# Altium PCB MolsonPCB.PcbDoc (part 5 of 9)
Units mil, origin at the board's own origin, x right, y up, seen from the top; angles counter-clockwise.
Board outline 8000 x 6000 mil, 14 copper layers (TopLayer (1 oz), InternalPlane1 (0.5 oz), InternalPlane2 (0.5 oz), MidLayer1 (0.5 oz), InternalPlane3 (0.5 oz), MidLayer2 (0.5 oz), InternalPlane4 (0.5 oz), InternalPlane5 (0.5 oz), MidLayer3 (0.5 oz), InternalPlane6 (0.5 oz), MidLayer4 (0.5 oz), InternalPlane7 (0.5 oz), InternalPlane8 (0.5 oz), BottomLayer (1 oz)), stack 86.2 mil thick; 657 components, 643 nets, 3094 pads, 1958 vias.
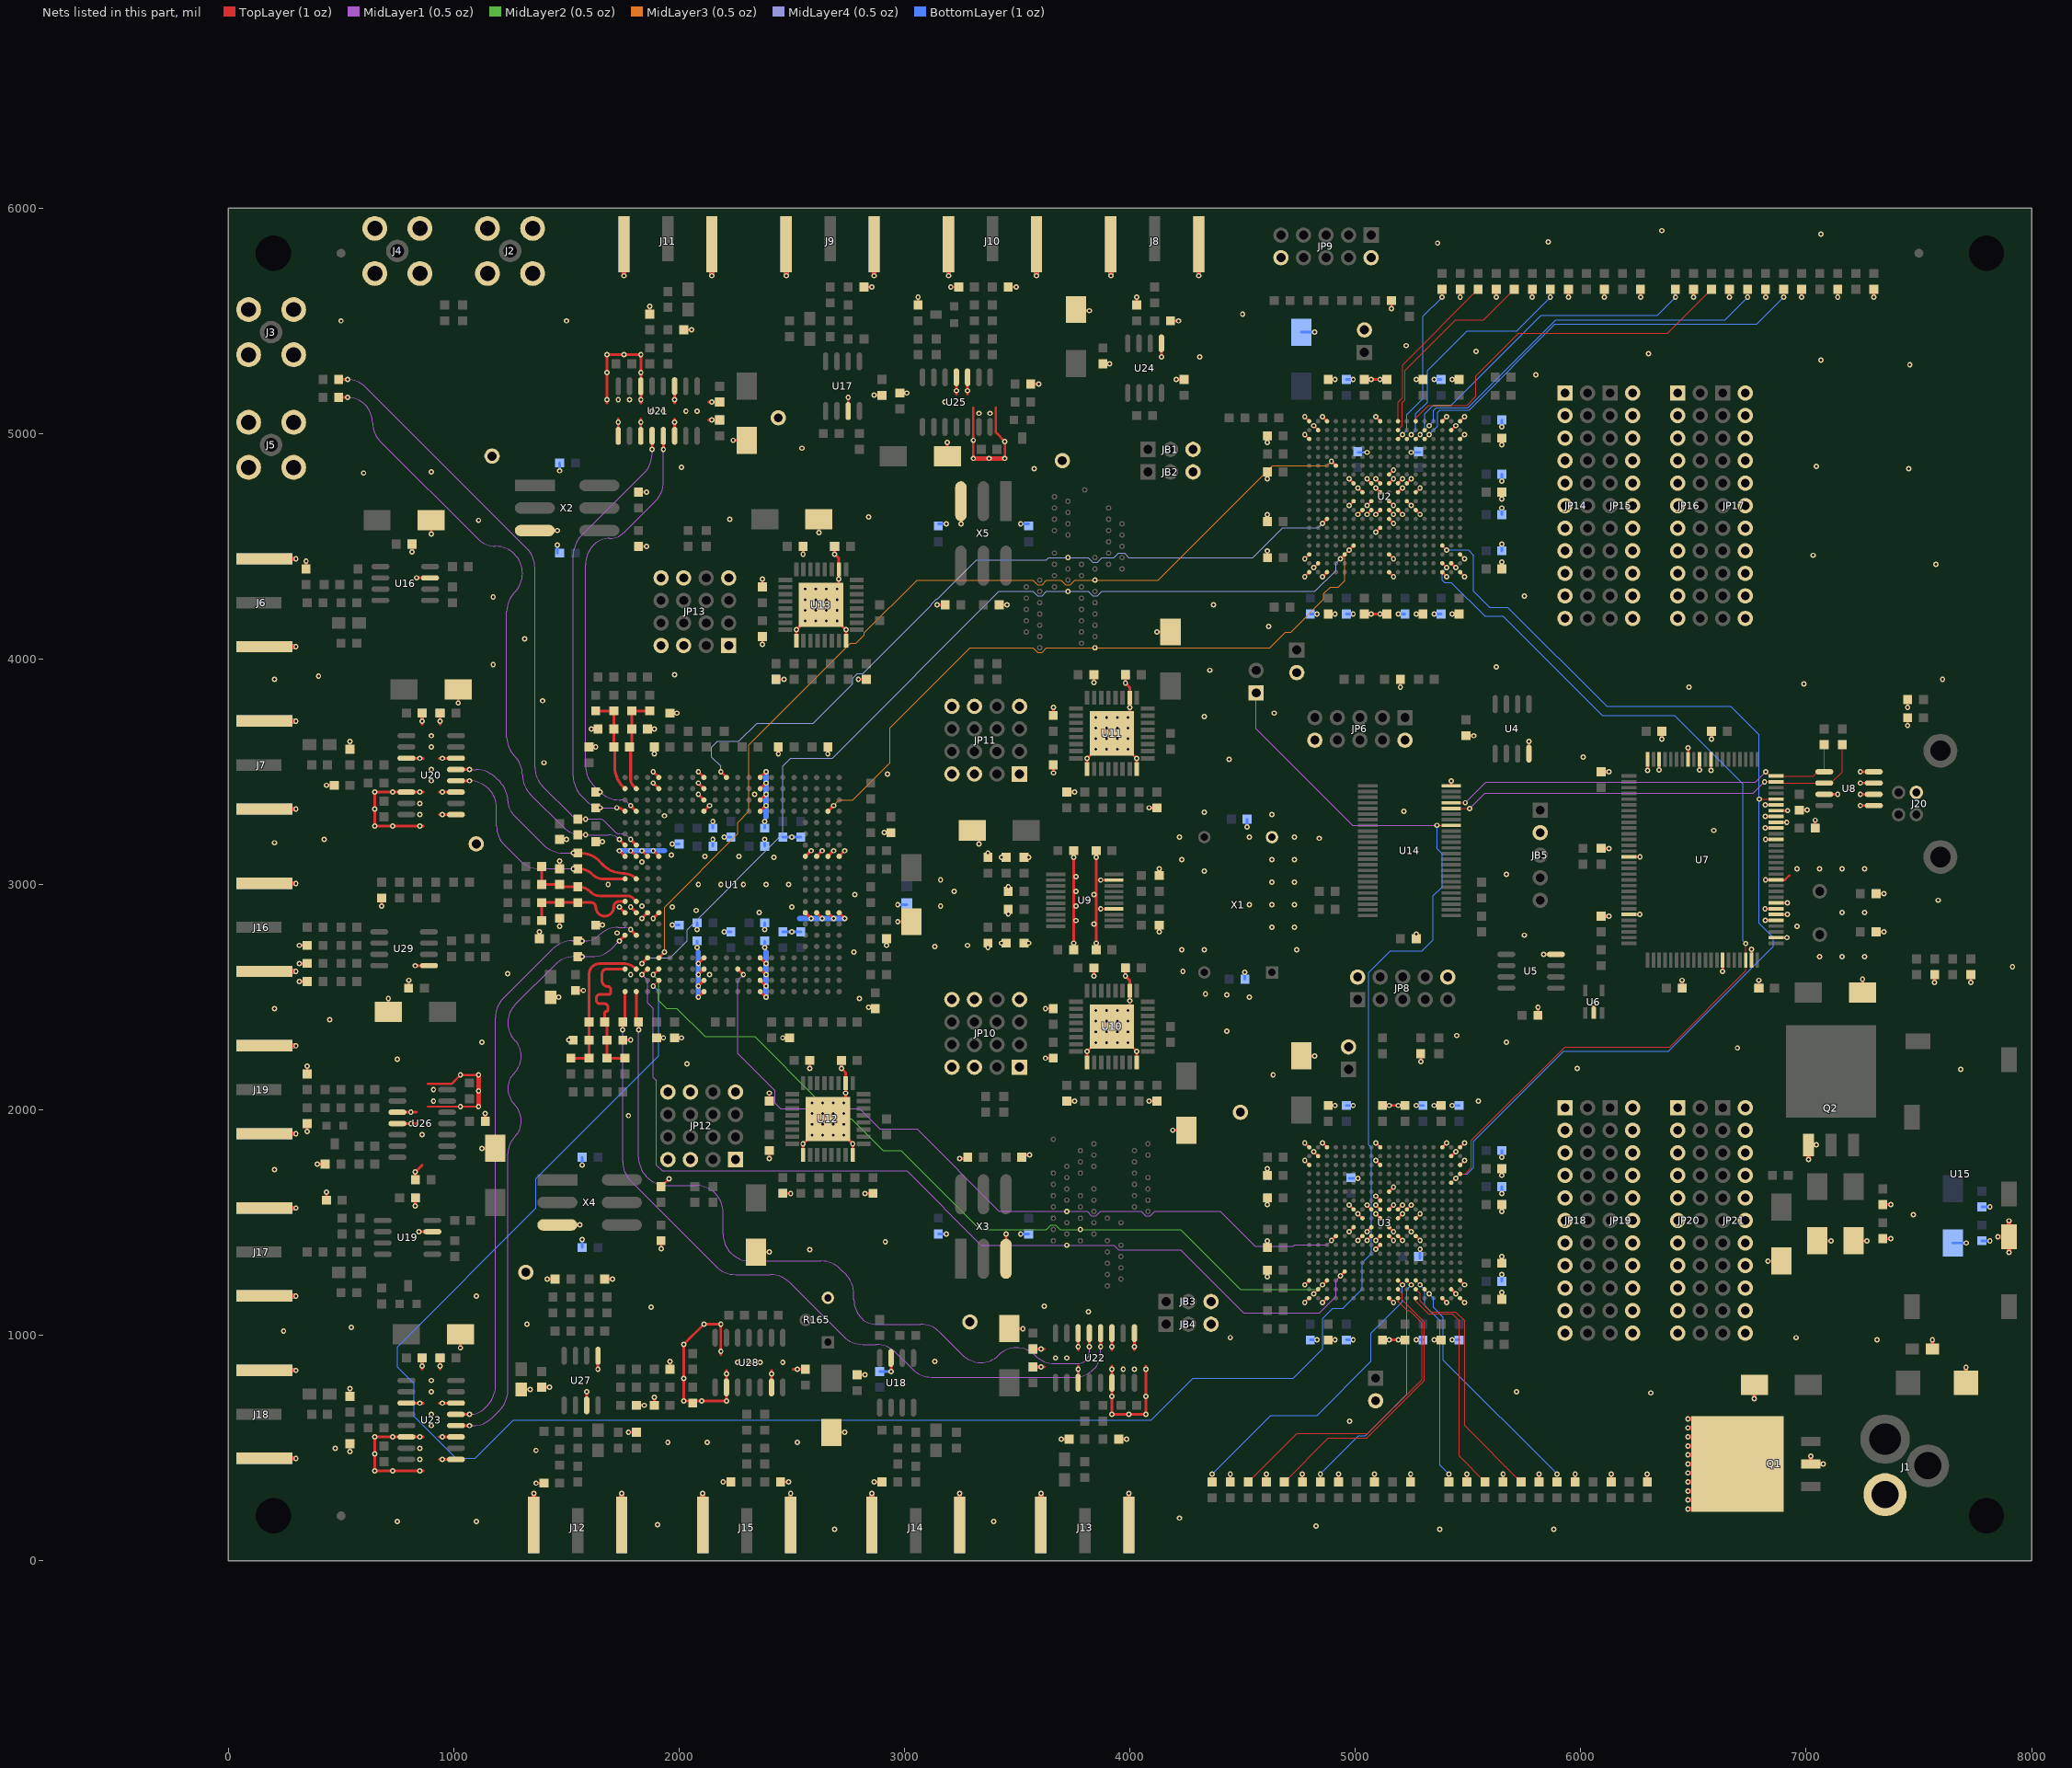
[diagram p17: the nets of this part, all layers, seen from the top]

## Via types
v1: diameter 24, hole 12, TopLayer (1 oz) to BottomLayer (1 oz), 1958 vias

## Nets (pads, with @x,y where several pads share a name; then routed paths per layer and width w, separated by ;. In a path a pad name is that pad's centre, name@x,y a point inside that pad or via, vN(x,y) a via of type N, cw(c..) or ccw(c..) an arc to the next point about the centre after c; other vN are vias at no path point) (continued)
FD15: U2.T2 U3.A4 U7.98 | length 4344.1
  TopLayer (1 oz) w5: U2.T2@5385.9,4424.73 v1(5405.59,4405.04) ; U3.A4@5464.65,1716.53 5486.53,1716.53 5515,1745 5515,1865 5930,2280 6395,2280 6731.93,2616.93 v1(6731.93,2738.07)
  BottomLayer (1 oz) w5: v1(5405.59,4405.04) 5385.91,4385.35 5385.91,4349.09 5395,4340 5425,4340 5575,4190 5655,4190 6095,3750 6415,3750 6720,3445 6720,2750 v1(6731.93,2738.07)
GND: C1.2 C2.2 C3.2 C4.2 C5.2 C6.2 C7.2 C8.2 C9.2 C10.2 C11.2 C12.2 C13.2 C14.2 C15.2 C16.2 C17.2 C18.2 C19.2 C20.2 C21.2 C22.2 C23.2 C24.2 C25.2 C26.2 C27.2 C28.2 C29.2 C30.2 C31.2 C32.2 C33.2 C34.2 C35.2 C36.2 C37.2 C38.2 C39.2 C40.2 C41.1 C42.1 C45.2 C46.2 C47.2 C50.2 C51.2 C52.2 C55.2 C56.2 C57.2 C60.2 C61.2 C62.2 C63.2 C64.2 C65.2 C66.2 C73.2 C76.2 C81.2 C85.2 C87.1 C88.2 C89.2 C93.2 C94.2 C95.2 C100.1 C101.2 C107.1 C113.2 C120.2 C122.2 C125.1 C126.2 C127.2 C128.2 C129.2 C130.2 C131.2 C132.2 C133.2 C138.2 C139.2 C140.2 C141.2 C142.2 C143.2 C144.2 C145.2 C146.2 C147.2 C148.2 C149.2 C150.2 C151.2 C152.2 C153.2 C154.2 C155.2 C156.2 C157.2 C158.1 C159.2 C160.2 C161.2 C162.2 C163.2 C164.2 C165.2 C166.2 C167.2 C168.2 C169.2 C170.2 C171.2 C172.2 C173.2 C174.2 C175.2 C176.2 C177.2 C178.2 C179.2 C180.2 C181.2 C182.2 C183.2 C184.2 C185.2 C186.2 C187.2 C188.2 C189.2 C190.2 C191.2 C192.2 C193.2 C194.2 C195.2 C196.2 C197.2 C198.2 C199.2 C200.2 C201.2 C202.2 C203.2 C204.2 C205.2 C206.2 C207.2 C208.2 C209.2 C210.2 C211.2 C212.2 C213.2 C214.2 C215.2 C216.2 C217.2 C218.2 C219.2 C220.2 C221.2 C222.2 C223.2 C224.2 C225.2 C226.2 C227.2 C228.2 C229.2 C230.2 C231.2 C232.2 C233.2 C234.2 C235.2 C236.2 C237.2 C238.2 C239.2 C240.2 C241.2 C242.2 C243.2 C244.2 C245.2 C246.2 C247.2 C248.2 C249.2 C250.2 C251.2 C252.2 C253.2 C254.2 C255.2 C256.2 C257.2 C258.2 C259.2 C260.2 C261.2 C262.2 C263.2 C264.2 C265.2 C266.2 C267.2 C268.2 C269.2 C270.2 C271.2 C272.2 C273.2 C274.2 C275.2 C276.2 C277.2 C278.2 C279.2 C280.2 C281.2 C282.2 C283.2 C284.2 C285.2 D3.2 D4.2 D5.2 D6.2 D7.2 D8.2 D9.2 D10.2 D11.2 D12.2 D13.2 D14.2 D15.2 D16.2 D17.2 D18.2 D19.2 D20.2 D21.2 D22.2 D23.2 D24.2 D25.2 D26.2 D27.2 D28.2 J1.2 J2.2 J3.2 J4.2 J5.2 J6.2 J7.2 J8.2 J9.2 J10.2 J11.2 J12.2 J13.2 J14.2 J15.2 J16.2 J17.2 J18.2 J19.2 J20.4 JB1.3 JB2.3 JB3.3 JB4.3 JB5.2 JP1.2 JP2.2 JP3.2 JP4.2 JP6.2 JP6.10 JP8.2 JP8.10 JP9.2 JP9.10 JP10.1 JP10.3 JP10.4 JP10.13 JP10.15 JP10.16 JP11.1 JP11.3 JP11.4 JP11.13 JP11.15 JP11.16 JP12.1 JP12.3 JP12.4 JP12.13 JP12.15 JP12.16 JP13.1 JP13.3 JP13.4 JP13.13 JP13.15 JP13.16 JP14.1 JP14.3 JP14.5 JP14.7 JP14.9 JP14.11 JP14.13 JP14.15 JP14.17 JP14.19 JP14.21 JP15.2 JP15.4 JP15.6 JP15.8 JP15.10 JP15.12 JP15.14 JP15.16 JP15.18 JP15.20 JP15.22 JP16.1 JP16.3 JP16.5 JP16.7 JP16.9 JP16.11 JP16.13 JP16.15 JP16.17 JP16.19 JP16.21 JP17.2 JP17.4 JP17.6 JP17.8 JP17.10 JP17.12 JP17.14 JP17.16 JP17.18 JP17.20 JP17.22 JP18.1 JP18.3 JP18.5 JP18.7 JP18.9 JP18.11 JP18.13 JP18.15 JP18.17 JP18.19 JP18.21 JP19.2 JP19.4 JP19.6 JP19.8 JP19.10 JP19.12 JP19.14 JP19.16 JP19.18 JP19.20 JP19.22 JP20.1 JP20.3 JP20.5 JP20.7 JP20.9 JP20.11 JP20.13 JP20.15 JP20.17 JP20.19 JP20.21 JP21.2 JP21.4 JP21.6 JP21.8 JP21.10 JP21.12 JP21.14 JP21.16 JP21.18 JP21.20 JP21.22 Q1.2 Q1.4 Q2.1 R6.2 R12.2 R15.1 R39.1 R40.1 R41.1 R42.1 R43.1 R44.1 R45.1 R46.1 R47.1 R48.1 R49.1 R50.1 R51.1 R52.1 R53.1 R54.1 R55.1 R56.1 R60.1 R83.1 R84.2 R91.1 R92.1 R101.1 R103.1 R111.1 R112.1 R122.1 R123.1 R124.1 R130.1 R131.2 R132.1 R133.1 R134.1 R135.2 R136.1 R137.1 R142.1 R143.2 R144.1 R145.2 R146.1 R156.1 R157.1 R158.1 R159.1 R164.2 R165.3 R166.1 R167.1 R195.1 R220.2 R221.2 R224.2 R225.2 R228.2 R229.2 R232.2 R233.2 TP1.1 TP2.1 TP3.1 TP4.1 TP5.1 TP6.1 TP7.1 U1.A8 U1.A13 U1.B8 U1.B13 U1.C8 U1.C13 U1.D8 U1.D13 U1.D19 U1.D20 U1.H1 U1.H2 U1.H3 U1.H4 U1.H17 U1.H18 U1.H19 U1.H20 U1.N1 U1.N2 U1.N3 U1.N4 U1.N17 U1.N18 U1.N19 U1.N20 U1.U8 U1.U13 U1.V8 U1.V13 U1.W8 U1.W13 U1.Y8 U1.Y13 U2.A1 U2.A3 U2.A16 U2.A18 U2.B2 U2.B17 U2.C1 U2.C18 U2.F9 U2.F11 U2.G8 U2.G10 U2.H8 U2.H9 U2.H11 U2.J6 U2.J8 U2.J10 U2.J11 U2.J18 U2.K1 U2.K3 U2.K7 U2.K8 U2.K9 U2.K11 U2.K12 U2.L8 U2.L10 U2.L11 U2.M9 U2.M11 U2.N8 U2.N10 U2.T1 U2.T18 U2.U2 U2.U17 U2.V1 U2.V3 U2.V16 U2.V18 U3.A1 U3.A3 U3.A16 U3.A18 U3.B2 U3.B17 U3.C1 U3.C18 U3.F9 U3.F11 U3.G8 U3.G10 U3.H8 U3.H9 U3.H11 U3.J6 U3.J8 U3.J10 U3.J11 U3.J18 U3.K1 U3.K3 U3.K7 U3.K8 U3.K9 U3.K11 U3.K12 U3.L8 U3.L10 U3.L11 U3.M9 U3.M11 U3.N8 U3.N10 U3.T1 U3.T18 U3.U2 U3.U17 U3.V1 U3.V3 U3.V16 U3.V18 U4.4 U5.4 U6.2 U7.2 U7.5 U7.6 U7.7 U7.8 U7.12 U7.19 U7.21 U7.22 U7.23 U7.24 U7.25 U7.39 U7.41 U7.43 U7.48 U7.50 U7.65 U7.75 U7.94 U7.99 U8.1 U8.2 U8.3 U8.4 U8.7 U9.4 U9.9 U10.10 U10.25 U10.32 U10.33 U11.10 U11.25 U11.32 U11.33 U12.10 U12.25 U12.32 U12.33 U13.10 U13.25 U13.32 U13.33 U14.24 U15.P3 U16.3 U17.3 U18.3 U19.3 U20.3 U20.6 U20.9 U20.11 U20.14 U21.3 U21.6 U21.9 U21.11 U21.14 U22.3 U22.6 U22.9 U22.11 U22.14 U23.3 U23.6 U23.9 U23.11 U23.14 U24.5 U25.10 U25.11 U26.10 U26.11 U27.3 U27.5 U28.2 U28.6 U29.5 X1.7 X2.3 X3.3 X4.3 X5.3 | length 34903.7
  TopLayer (1 oz) w10: 885,2015 v1(1030,2015) v1(1110,2015) ; 885,2115 990,2115 v1(1030,2155) v1(1110,2155) ; U21.11@1830,4990 1830,5065 ; 2185,915 v1(2185,1050) ; v1(2370,4065) R55.1@2370,4100 ; R56.1@2370,4320 v1(2370,4355) ; v1(2400,1785) R53.1@2400,1820 ; R54.1@2400,2040 v1(2400,2075) ; v1(3305,4890) v1(3305,4970) 3305,5115 ; 3405,5115 3405,5005 v1(3445,4965) v1(3445,4890) ; v1(3625,2230) R49.1@3660,2230 ; v1(3625,2450) R50.1@3660,2450 ; v1(3870,2891.61) U9.4@3928.94,2891.61 ; v1(3870,3019.57) U9.9@3928.94,3019.57 ; v1(4775.67,1145.67) U3.V18@4795.35,1165.35 ; v1(4775.67,1224.41) U3.V16@4795.35,1244.1 ; v1(4775.67,1775.59) U3.V3@4795.35,1755.9 ; v1(4775.67,1854.33) U3.V1@4795.35,1834.65 ; v1(4775.67,4365.67) U2.A1@4795.35,4385.35 ; v1(4775.67,4444.41) U2.A3@4795.35,4464.1 ; v1(4775.67,4995.59) U2.A16@4795.35,4975.9 ; v1(4775.67,5074.33) U2.A18@4795.35,5054.65 ; v1(4815.04,1185.04) U3.U17@4834.73,1204.73 ; v1(4815.04,1814.96) U3.U2@4834.73,1795.27 ; v1(4815.04,4405.04) U2.B2@4834.73,4424.73 ; v1(4815.04,5034.96) U2.B17@4834.73,5015.27 ; v1(4854.41,1145.67) U3.T18@4874.1,1165.35 ; v1(4854.41,1854.33) U3.T1@4874.1,1834.65 ; v1(4854.41,4365.67) U2.C1@4874.1,4385.35 ; v1(4854.41,5074.33) U2.C18@4874.1,5054.65 ; v1(4972.52,1460.63) U3.N10@4992.2,1480.31 ; v1(4972.52,1578.74) U3.N8@4992.2,1559.06 ; v1(4972.52,4680.63) U2.F9@4992.2,4700.31 ; v1(4972.52,4798.74) U2.F11@4992.2,4779.06 ; v1(5011.89,1421.26) U3.M11@5031.57,1440.94 ; v1(5011.89,1539.37) U3.M9@5031.57,1519.69 ; v1(5011.89,4641.26) U2.G8@5031.57,4660.94 ; v1(5011.89,4759.37) U2.G10@5031.57,4739.69 ; v1(5051.26,1421.26) U3.L11@5070.94,1440.94 ; v1(5051.26,1460.63) U3.L10@5070.94,1480.31 ; v1(5051.26,1578.74) U3.L8@5070.94,1559.06 ; v1(5051.26,4641.26) U2.H8@5070.94,4660.94 ; v1(5051.26,4680.63) U2.H9@5070.94,4700.31 ; v1(5051.26,4798.74) U2.H11@5070.94,4779.06 ; v1(5090.63,1381.89) U3.K12@5110.31,1401.57 ; v1(5090.63,1421.26) U3.K11@5110.31,1440.94 ; v1(5090.63,1539.37) U3.K9@5110.31,1519.69 ; v1(5090.63,1578.74) U3.K8@5110.31,1559.06 ; v1(5090.63,1618.11) U3.K7@5110.31,1598.43 ; v1(5090.63,1775.59) U3.K3@5110.31,1755.9 ; v1(5090.63,1854.33) U3.K1@5110.31,1834.65 ; v1(5090.63,4562.52) U2.J6@5110.31,4582.2 ; v1(5090.63,4641.26) U2.J8@5110.31,4660.94 ; v1(5090.63,4759.37) U2.J10@5110.31,4739.69 ; v1(5090.63,4798.74) U2.J11@5110.31,4779.06 ; v1(5090.63,5074.33) U2.J18@5110.31,5054.65 ; U3.J18@5149.69,1165.35 v1(5169.37,1145.67) ; U3.J11@5149.69,1440.94 v1(5169.37,1421.26) ; U3.J10@5149.69,1480.31 v1(5169.37,1460.63) ; U3.J8@5149.69,1559.06 v1(5169.37,1578.74) ; U3.J6@5149.69,1637.8 v1(5169.37,1657.48) ; U2.K1@5149.69,4385.35 v1(5169.37,4365.67) ; U2.K3@5149.69,4464.1 v1(5169.37,4444.41) ; U2.K7@5149.69,4621.57 v1(5169.37,4601.89) ; U2.K8@5149.69,4660.94 v1(5169.37,4641.26) ; U2.K9@5149.69,4700.31 v1(5169.37,4680.63) ; U2.K11@5149.69,4779.06 v1(5169.37,4798.74) ; U2.K12@5149.69,4818.43 v1(5169.37,4838.11) ; U3.H11@5189.06,1440.94 v1(5208.74,1421.26) ; U3.H9@5189.06,1519.69 v1(5208.74,1539.37) ; U3.H8@5189.06,1559.06 v1(5208.74,1578.74) ; U2.L8@5189.06,4660.94 v1(5208.74,4641.26) ; U2.L10@5189.06,4739.69 v1(5208.74,4759.37) ; U2.L11@5189.06,4779.06 v1(5208.74,4798.74) ; U3.G10@5228.43,1480.31 v1(5248.11,1460.63) ; U3.G8@5228.43,1559.06 v1(5248.11,1578.74) ; U2.M9@5228.43,4700.31 v1(5248.11,4680.63) ; U2.M11@5228.43,4779.06 v1(5248.11,4798.74) ; U3.F11@5267.8,1440.94 v1(5287.48,1421.26) ; U3.F9@5267.8,1519.69 v1(5287.48,1539.37) ; U2.N8@5267.8,4660.94 v1(5287.48,4641.26) ; U2.N10@5267.8,4739.69 v1(5287.48,4759.37) ; U3.C18@5385.9,1165.35 v1(5405.59,1145.67) ; U3.C1@5385.9,1834.65 v1(5405.59,1854.33) ; U2.T1@5385.9,4385.35 v1(5405.59,4365.67) ; U2.T18@5385.9,5054.65 v1(5405.59,5074.33) ; U14.24@5425.04,3437.5 v1(5425.04,3459.96) ; U3.B17@5425.27,1204.73 v1(5444.96,1185.04) ; U3.B2@5425.27,1795.27 v1(5444.96,1814.96) ; U2.U2@5425.27,4424.73 v1(5444.96,4405.04) ; U2.U17@5425.27,5015.27 v1(5444.96,5034.96) ; U3.A18@5464.65,1165.35 v1(5484.33,1145.67) ; U3.A16@5464.65,1244.1 v1(5484.33,1224.41) ; U3.A3@5464.65,1755.9 v1(5484.33,1775.59) ; U3.A1@5464.65,1834.65 v1(5484.33,1854.33) ; U2.V1@5464.65,4385.35 v1(5484.33,4365.67) ; U2.V3@5464.65,4464.1 v1(5484.33,4444.41) ; U2.V16@5464.65,4975.9 v1(5484.33,4995.59) ; U2.V18@5464.65,5054.65 v1(5484.33,5074.33) ; U7.75@6213.03,2866.89 v1(6261.89,2866.89) ; U7.65@6213.03,3122.8 v1(6262.8,3122.8) ; v1(6296.89,3506.89) U7.50@6296.89,3555.08 ; v1(6348.07,3508.07) U7.48@6348.07,3555.08 ; U7.43@6476.02,3555.08 v1(6476.02,3606.02) ; v1(6527.2,3507.8) U7.41@6527.2,3555.08 ; v1(6578.39,3506.61) U7.39@6578.39,3555.08 ; v1(6629.57,2615.43) U7.94@6629.57,2664.92 ; U7.99@6757.52,2664.92 v1(6757.52,2712.52) ; v1(6817.52,2892.48) U7.7@6866.97,2892.48 ; v1(6818.07,3301.93) U7.23@6866.97,3301.93 ; v1(6818.11,3353.11) U7.25@6866.97,3353.11 ; v1(6818.7,2841.3) U7.5@6866.97,2841.3 ; v1(6819.25,3250.75) U7.21@6866.97,3250.75 ; v1(6819.57,3020.43) 6905.43,3020.43 6925,3040 ; v1(6819.57,3199.57) U7.19@6866.97,3199.57 ; U7.2@6866.97,2764.53 v1(6914.53,2764.53) ; U7.6@6866.97,2866.89 v1(6916.89,2866.89) ; U7.8@6866.97,2918.07 v1(6916.93,2918.07) ; U7.22@6866.97,3276.34 v1(6913.66,3276.34) ; U7.24@6866.97,3327.52 v1(6917.48,3327.52)
  TopLayer (1 oz) w12: v1(315,2570) R124.1@350,2570 ; v1(315,2650) R123.1@350,2650 ; v1(315,2730) R122.1@350,2730 ; C199.2@345,4400 v1(345,4435) ; v1(350,1905) R137.1@350,1940 ; R112.1@350,2160 v1(350,2195) ; v1(395,1760) C113.2@430,1760 ; C202.2@435,1600 v1(435,1635) ; v1(435,3440) R130.1@470,3440 ; v1(540,485) R136.1@540,520 ; R111.1@540,730 v1(540,765) ; R83.1@540,3600 v1(540,3635) ; v1(680,2905) R166.1@680,2940 ; C139.2@710,2435 v1(710,2495) ; U26.11@750.32,1939.86 835,1940 ; U26.10@750.32,1989.86 835,1990 ; U23.3@790,700 865,700 ; U20.3@790,3560 865,3560 ; C125.1@800,2540 v1(800,2575) ; v1(815,4475) C73.2@815,4510 ; v1(830,1575) C120.2@830,1610 ; C107.1@830,1690 v1(830,1725) 860,1755 ; v1(830,2640) U29.5@890,2640 ; v1(835,4360) U16.3@895,4360 ; v1(845,1460) U19.3@905,1460 ; 860,850 C132.2@860,900 ; 860,3710 C127.2@860,3760 ; 865,400 v1(730,400) v1(650,400) v1(650,475) v1(650,550) v1(730,550) U23.6@790,550 865,550 ; 865,3260 v1(730,3260) v1(650,3260) v1(650,3335) v1(650,3410) v1(730,3410) U20.6@790,3410 865,3410 ; v1(900,4555) C203.2@900,4615 ; 935,450 U23.9@1010,450 ; 935,550 U23.11@1010,550 ; 935,700 U23.14@1010,700 ; 935,3310 U20.9@1010,3310 ; 935,3410 U20.11@1010,3410 ; 935,3560 U20.14@1010,3560 ; 940,850 C133.2@940,900 ; 940,3710 C126.2@940,3760 ; v1(1020,3805) C207.2@1020,3865 ; v1(1030,945) C210.2@1030,1005 ; v1(1125,1830) C206.2@1185,1830 ; C122.2@1140,1950 v1(1140,1985) ; C95.2@1300,760 v1(1340,760) ; X2.3@1360,4570 v1(1460,4570) ; v1(1365,345) C93.2@1400,345 ; C215.2@1380,2760 v1(1380,2790) ; C94.2@1390,770 v1(1425,770) ; v1(1415,1250) R157.1@1450,1250 ; C227.2@1430,2500 v1(1465,2500) ; X4.3@1460,1490 v1(1560,1490) ; v1(1470,2815) R144.1@1470,2850 ; R145.2@1470,3070 v1(1470,3105) ; C214.2@1470,3200 v1(1500,3200) ; C216.2@1540,2530 v1(1575,2530) ; U27.3@1590,690 v1(1590,750) ; C211.2@1600,3610 v1(1630,3610) ; v1(1610,3690) R143.2@1640,3690 ; C7.2@1630,2820 v1(1660,2820) ; C8.2@1630,3190 v1(1660,3190) ; v1(1640,850) U27.5@1640,910 ; R156.1@1670,1250 v1(1705,1250) ; 1680,5135 v1(1680,5270) v1(1680,5350) v1(1755,5350) v1(1830,5350) v1(1830,5270) U21.6@1830,5210 1830,5135 ; U21.9@1730,4990 1730,5065 ; v1(1735,2900) U1.A8@1760,2875 ; v1(1735,3150) U1.A13@1760,3125 ; R159.1@1750,2310 v1(1785,2310) ; v1(1775,570) C89.2@1810,570 ; v1(1785,2900) U1.B8@1810,2875 ; v1(1785,3150) U1.B13@1810,3125 ; R164.2@1810,690 v1(1845,690) ; R221.2@1820,4500 v1(1855,4500) ; R220.2@1820,4740 v1(1855,4740) ; v1(1835,2850) U1.C8@1860,2875 ; v1(1835,3150) U1.C13@1860,3125 ; R142.1@1860,3690 v1(1890,3690) ; R133.1@1870,5530 v1(1870,5565) ; v1(1885,2850) U1.D8@1910,2875 ; v1(1885,3150) U1.D13@1910,3125 ; v1(1885,3450) U1.D19@1910,3425 ; v1(1885,3500) U1.D20@1910,3475 ; C88.2@1890,690 v1(1890,725) ; v1(1890,3580) C1.2@1890,3610 ; C217.2@1900,2320 v1(1930,2320) ; v1(1920,1385) R229.2@1920,1420 ; R228.2@1920,1660 v1(1955,1695) ; R60.1@1960,850 v1(1960,885) ; C212.2@1960,3760 v1(1990,3760) ; C5.2@1980,2320 v1(2010,2320) ; U21.14@1980,4990 1980,5065 ; 1980,5135 U21.3@1980,5210 ; R92.1@2020,5460 v1(2055,5460) ; v1(2085,2500) U1.H1@2110,2525 ; v1(2085,2550) U1.H2@2110,2575 ; v1(2085,2600) U1.H3@2110,2625 ; v1(2085,2650) U1.H4@2110,2675 ; v1(2085,3400) U1.H18@2110,3375 ; v1(2085,3450) U1.H19@2110,3425 ; v1(2085,3500) U1.H20@2110,3475 ; U1.H17@2110,3325 v1(2135,3350) ; 2130,5060 C128.2@2180,5060 ; 2130,5140 C129.2@2180,5140 ; v1(2185,1050) v1(2110,1050) v1(2020,960) v1(2020,810) v1(2020,710) 2060,710 v1(2100,710) v1(2210,710) 2210,769.68 2210,845 ; v1(2195,350) R103.1@2230,350 ; v1(2240,4970) C208.2@2300,4970 ; C243.2@2340,1370 v1(2400,1370) ; U1.N1@2360,2525 v1(2385,2500) ; U1.N2@2360,2575 v1(2385,2550) ; U1.N3@2360,2625 v1(2385,2600) ; U1.N4@2360,2675 v1(2385,2650) ; U1.N17@2360,3325 v1(2385,3350) ; U1.N18@2360,3375 v1(2385,3400) ; U1.N19@2360,3425 v1(2385,3450) ; U1.N20@2360,3475 v1(2385,3500) ; U28.6@2409.86,769.68 2410,845 ; C61.2@2430,3910 v1(2465,3910) ; v1(2440,3580) C2.2@2440,3610 ; R135.2@2450,350 v1(2485,350) ; C55.2@2460,1630 v1(2495,1630) ; v1(2460,2320) C6.2@2490,2320 ; 2505,850 C145.2@2560,850 ; U13.25@2519.76,4081.54 v1(2519.76,4129.76) U13.33@2540,4150 ; U12.25@2549.76,1801.54 v1(2549.76,1849.76) U12.33@2570,1870 ; v1(2550,4465) C239.2@2550,4500 ; U1.U8@2560,2875 v1(2585,2850) ; U1.U13@2560,3125 v1(2585,3150) ; v1(2580,2185) C236.2@2580,2220 ; U1.V8@2610,2875 v1(2635,2850) ; U1.V13@2610,3125 v1(2635,3150) ; v1(2620,4560) C244.2@2620,4620 ; U1.W8@2660,2875 v1(2685,2850) ; U1.W13@2660,3125 v1(2685,3150) ; v1(2660,3580) C213.2@2660,3610 ; C205.2@2675,570 v1(2735,570) ; C62.2@2690,4500 v1(2690,4465) 2708.74,4446.26 U13.33@2708.74,4331.26 ; U1.Y8@2710,2875 v1(2735,2850) ; U1.Y13@2710,3125 v1(2735,3150) ; C57.2@2720,2220 v1(2720,2185) 2738.74,2166.26 U12.33@2738.74,2051.26 ; U13.33@2720,4150 v1(2740.24,4129.76) U13.32@2740.24,4081.53 ; U12.33@2750,1870 v1(2770.24,1849.76) U12.32@2770.24,1801.53 ; U17.3@2750,5100 v1(2750,5160) ; C101.2@2790,825 v1(2825,825) ; v1(2795,3910) C60.2@2830,3910 ; C200.2@2820,5650 v1(2855,5650) ; v1(2825,1630) C56.2@2860,1630 ; v1(2840,2455) C218.2@2870,2455 ; v1(2865,350) C201.2@2900,350 ; v1(2865,5170) C85.2@2900,5170 ; v1(2910,3230) C3.2@2940,3230 ; v1(2920,2730) C4.2@2920,2760 ; v1(2940,840) U18.3@2940,900 ; v1(2970,2835) C167.2@3030,2835 ; C144.2@2980,5180 v1(3010,5180) ; C76.2@3060,5570 v1(3060,5605) ; v1(3145,4240) R233.2@3180,4240 ; C204.2@3190,4900 v1(3190,4960) ; v1(3205,5650) R132.1@3240,5650 ; U25.11@3229.86,5249.68 3230,5175 ; v1(3245,1785) R224.2@3280,1785 ; v1(3250,4600) X5.3@3250,4700 ; U25.10@3279.86,5249.68 3280,5175 ; v1(3330,3180) C245.2@3330,3240 ; R232.2@3420,4240 v1(3455,4240) ; X3.3@3450,1340 v1(3450,1450) ; R91.1@3460,5650 v1(3495,5650) ; C209.2@3465,1030 v1(3525,1030) ; R225.2@3520,1800 v1(3555,1800) ; C81.2@3560,5220 v1(3595,5220) ; C130.2@3570,860 3620,860 ; C131.2@3570,940 3620,940 ; v1(3660,3495) R51.1@3660,3530 ; R52.1@3660,3750 v1(3660,3785) ; v1(3695,540) R101.1@3730,540 ; C46.2@3720,2040 v1(3755,2040) ; C51.2@3720,3410 v1(3755,3410) ; C141.2@3750,2710 C140.2@3750,3150 ; C138.2@3760,5545 v1(3820,5545) ; U22.3@3770,790 3770,865 ; 3770,935 U22.14@3770,1010 ; U10.25@3809.76,2211.54 v1(3809.76,2259.76) U10.33@3830,2280 ; U11.25@3809.76,3511.54 v1(3809.76,3559.76) U11.33@3830,3580 ; v1(3840,2595) C230.2@3840,2630 ; v1(3840,3895) C233.2@3840,3930 ; C247.2@3850,2710 C246.2@3850,3150 ; C87.1@3880,5310 v1(3910,5310) ; 3920,865 U22.6@3920,790 v1(3920,730) v1(3920,650) v1(3995,650) v1(4070,650) v1(4070,730) 4070,865 ; 3920,935 U22.11@3920,1010 ; R134.1@3950,540 v1(3985,540) ; C45.2@3980,2630 v1(3980,2593.74) 3998.74,2575 U10.33@3998.74,2461.26 ; C50.2@3980,3930 v1(3980,3893.74) 3998.74,3875 U11.33@3998.74,3761.26 ; U10.33@4010,2280 v1(4030.24,2259.76) U10.32@4030.24,2211.53 ; U11.33@4010,3580 v1(4030.24,3559.76) U11.32@4030.24,3511.53 ; 4020,935 U22.9@4020,1010 ; R131.2@4030,5570 v1(4030,5605) ; v1(4085,2040) C47.2@4120,2040 ; v1(4085,3340) C52.2@4120,3340 ; v1(4120,4120) C242.2@4180,4120 ; v1(4140,5340) U24.5@4140,5400 ; R84.2@4180,5500 v1(4215,5500) ; v1(4190,1910) C241.2@4250,1910 ; v1(4205,5240) R146.1@4240,5240 ; D20.2@4445,350 v1(4445,385) ; D19.2@4605,350 v1(4605,385) ; v1(4610,1260) C33.2@4610,1290 ; C195.2@4610,1390 v1(4610,1420) ; v1(4610,1580) C34.2@4610,1610 ; C193.2@4610,1710 v1(4610,1740) ; C14.2@4610,4450 v1(4610,4480) ; C20.2@4610,4610 v1(4610,4640) ; v1(4610,4800) C180.2@4610,4830 ; v1(4610,4960) C21.2@4610,4990 ; C251.2@4760,2240 v1(4820,2240) ; D18.2@4765,350 v1(4765,385) ; C197.2@4880,980 v1(4910,980) ; C30.2@4880,2020 v1(4910,2020) ; C182.2@4880,4200 v1(4910,4200) ; C178.2@4880,5240 v1(4910,5240) ; D17.2@4925,350 v1(4925,385) ; C149.2@5040,4200 C148.2@5140,4200 ; C147.2@5040,5240 C146.2@5140,5240 ; D15.2@5085,350 v1(5085,385) ; C150.2@5120,980 C151.2@5220,980 ; C152.2@5120,2020 C153.2@5220,2020 ; v1(5160,5555) R15.1@5160,5590 ; v1(5200,3875) R6.2@5200,3910 ; D16.2@5245,350 v1(5245,385) ; v1(5270,4200) C18.2@5300,4200 ; v1(5270,5240) C16.2@5300,5240 ; v1(5290,2215) R12.2@5290,2250 ; v1(5350,980) C31.2@5380,980 ; v1(5350,2020) C192.2@5380,2020 ; v1(5430,4200) C183.2@5460,4200 ; v1(5430,5240) C179.2@5460,5240 ; v1(5465,5605) D8.2@5465,5640 ; C9.2@5490,3660 v1(5525,3660) ; D26.2@5495,350 v1(5495,385) ; v1(5625,5605) D7.2@5625,5640 ; C196.2@5650,1160 v1(5650,1190) ; C32.2@5650,1320 v1(5650,1350) ; v1(5650,1550) C194.2@5650,1580 ; v1(5650,1710) C28.2@5650,1740 ; C19.2@5650,4400 v1(5650,4430) ; v1(5650,4710) C181.2@5650,4740 ; v1(5650,4950) C15.2@5650,4980 ; D25.2@5655,350 v1(5655,385) ; U4.4@5770,3580 v1(5770,3635) ; v1(5785,5605) D6.2@5785,5640 ; C22.2@5810,2420 v1(5810,2455) ; D24.2@5815,350 v1(5815,385) ; v1(5835,2690) U5.4@5890,2690 ; v1(5945,5605) D5.2@5945,5640 ; D23.2@5975,350 v1(5975,385) ; U6.2@6057,2430 v1(6057,2467) ; C168.2@6090,2860 v1(6125,2860) ; C40.2@6090,3160 v1(6125,3160) ; C36.2@6090,3500 v1(6125,3500) ; v1(6105,5605) D3.2@6105,5640 ; D21.2@6135,350 v1(6135,385) ; v1(6265,5605) D4.2@6265,5640 ; D22.2@6295,350 v1(6295,385) ; v1(6360,3645) C169.2@6360,3680 ; C35.2@6450,2540 v1(6450,2575) ; v1(6500,5605) D14.2@6500,5640 ; v1(6580,3645) C37.2@6580,3680 ; v1(6660,5605) D13.2@6660,5640 ; C38.2@6790,2540 v1(6790,2575) ; v1(6820,5605) D12.2@6820,5640 ; v1(6830,1330) C154.2@6890,1330 ; R195.1@6970,3330 v1(7005,3330) ; v1(6980,5605) D11.2@6980,5640 ; C39.2@7040,3250 v1(7040,3285) ; C66.2@7050,1420 v1(7110,1420) ; U8.7@7080,3400 v1(7140,3400) ; v1(7140,5605) D9.2@7140,5640 ; C262.2@7210,1420 v1(7270,1420) ; v1(7240,3350) U8.1@7300,3350 ; v1(7240,3400) U8.2@7300,3400 ; v1(7240,3450) U8.3@7300,3450 ; v1(7240,3500) U8.4@7300,3500 ; C260.2@7250,2520 v1(7250,2580) ; v1(7300,5605) D10.2@7300,5640 ; C41.1@7310,2790 v1(7345,2790) ; C42.1@7310,2960 v1(7345,2960) ; C65.2@7340,1430 v1(7375,1430) ; C261.2@7340,1580 v1(7375,1580) ; v1(7450,3705) R167.1@7450,3740 ; v1(7450,3785) C158.1@7450,3820 ; v1(7570,2565) D27.2@7570,2600 ; v1(7730,2565) D28.2@7730,2600 v1(7730,2565)
  TopLayer (1 oz) w20: J18.2@160,455 v1(300,455) ; J18.2@160,845 v1(300,845) ; J17.2@160,1175 v1(300,1175) ; J17.2@160,1565 v1(300,1565) ; J19.2@160,1895 v1(300,1895) ; J19.2@160,2285 v1(300,2285) ; J16.2@160,2615 v1(300,2615) ; J16.2@160,3005 v1(300,3005) ; J7.2@160,3335 v1(300,3335) ; J7.2@160,3725 v1(300,3725) ; J6.2@160,4055 v1(300,4055) ; J6.2@160,4445 v1(300,4445) ; v1(1110,2015) v1(1110,2085) v1(1110,2155) ; J12.2@1355,160 v1(1355,300) ; J12.2@1745,160 v1(1745,300) ; v1(1755,5700) J11.2@1755,5840 ; J15.2@2105,160 v1(2105,300) ; v1(2145,5700) J11.2@2145,5840 ; v1(2475,5700) J9.2@2475,5840 ; J15.2@2495,160 v1(2495,300) ; J14.2@2855,160 v1(2855,300) ; v1(2865,5700) J9.2@2865,5840 ; v1(3195,5700) J10.2@3195,5840 ; J14.2@3245,160 v1(3245,300) ; v1(3305,4890) v1(3375,4890) v1(3445,4890) ; v1(3585,5700) J10.2@3585,5840 ; J13.2@3605,160 v1(3605,300) ; v1(3915,5700) J8.2@3915,5840 ; J13.2@3995,160 v1(3995,300) ; v1(4305,5700) J8.2@4305,5840 ; v1(6475,230) Q1.4@6500,230 ; v1(6475,270) Q1.4@6500,270 ; v1(6475,310) Q1.4@6500,310 ; v1(6475,350) Q1.4@6500,350 ; v1(6475,390) Q1.4@6500,390 ; v1(6475,430) Q1.4@6500,430 ; v1(6475,470) Q1.4@6500,470 ; v1(6475,510) Q1.4@6500,510 ; v1(6475,550) Q1.4@6500,550 ; v1(6475,590) Q1.4@6500,590 ; v1(6475,630) Q1.4@6500,630 ; v1(6770,720) C64.2@6770,780 ; v1(7010,1780) Q2.1@7010,1845 v1(7045,1845) ; v1(7020,465) Q1.2@7020,430 v1(7075,430) ; C198.2@7560,940 v1(7560,980) ; C63.2@7708.94,790 v1(7708.94,858.94) ; v1(7849.96,1438.07) U15.P3@7899.72,1438.07 ; v1(7899.72,1368.31) v1(7899.72,1508.15)
  BottomLayer (1 oz) w12: v1(815,4475) C266.2@815,4510 ; v1(830,1575) C269.2@830,1610 ; v1(860,865) C276.2@860,900 ; v1(860,3725) C271.2@860,3760 ; v1(940,865) C277.2@940,900 ; v1(940,3725) C270.2@940,3760 ; C282.2@1460,4470 v1(1460,4505) ; v1(1470,4835) C278.2@1470,4870 ; C285.2@1570,1390 v1(1570,1425) ; v1(1570,1755) C281.2@1570,1790 ; v1(1970,2820) C163.2@2000,2820 ; v1(1970,3180) C159.2@2000,3180 ; v1(2080,2720) C164.2@2080,2750 ; v1(2080,2800) C226.2@2080,2830 ; v1(2145,5060) C272.2@2180,5060 ; v1(2145,5140) C273.2@2180,5140 ; C222.2@2150,3170 v1(2150,3200) ; C160.2@2150,3250 v1(2150,3280) ; v1(2200,2790) C225.2@2230,2790 ; v1(2200,3210) C221.2@2230,3210 ; v1(2380,2720) C165.2@2380,2750 ; v1(2380,2800) C224.2@2380,2830 ; C220.2@2380,3170 v1(2380,3200) ; C161.2@2380,3250 v1(2380,3280) ; C240.2@2430,3910 v1(2465,3910) ; C237.2@2460,1630 v1(2495,1630) ; C166.2@2460,2790 C223.2@2540,2790 ; C162.2@2460,3210 C219.2@2540,3210 ; v1(2690,4465) C238.2@2690,4500 ; v1(2720,2185) C235.2@2720,2220 ; v1(2865,5170) C267.2@2900,5170 ; C268.2@2890,840 v1(2940,840) ; v1(2970,2910) C228.2@3010,2910 ; C283.2@3150,1450 v1(3185,1450) ; C280.2@3150,4600 v1(3185,4600) ; v1(3515,1450) C279.2@3550,1450 ; v1(3515,4600) C284.2@3550,4600 ; C274.2@3570,860 v1(3605,860) ; C275.2@3570,940 v1(3605,940) ; C231.2@3720,2040 v1(3755,2040) ; C234.2@3720,3410 v1(3755,3410) ; v1(3980,2593.74) C229.2@3980,2630 ; v1(3980,3893.74) C232.2@3980,3930 ; C249.2@4510,2580 v1(4510,2610) ; v1(4520,3255) C248.2@4520,3290 ; v1(4610,1260) C188.2@4610,1290 ; C27.2@4610,1390 v1(4610,1420) ; v1(4610,1580) C186.2@4610,1610 ; C29.2@4610,1710 v1(4610,1740) ; C174.2@4610,4610 v1(4610,4640) ; v1(4610,4800) C17.2@4610,4830 ; v1(4610,4960) C172.2@4610,4990 ; C250.2@4760,5450 v1(4820,5450) ; C190.2@4800,980 v1(4830,980) ; C155.2@4800,4200 v1(4830,4200) ; C157.2@4960,980 v1(4990,980) ; C184.2@4960,2020 v1(4990,2020) ; C176.2@4960,4200 v1(4990,4200) ; C170.2@4960,5240 v1(4990,5240) ; C23.2@4972.52,1696.85 v1(5011.89,1696.85) ; C10.2@5013.15,4916.85 v1(5051.26,4916.85) ; v1(5190,4200) C143.2@5220,4200 ; v1(5248.11,4916.85) C11.2@5287.48,4916.85 ; v1(5270,980) C156.2@5300,980 ; v1(5270,2020) C24.2@5300,2020 ; C26.2@5287.48,1342.52 v1(5287.48,1381.89) ; v1(5350,4200) C177.2@5380,4200 ; v1(5350,5240) C171.2@5380,5240 ; v1(5430,980) C191.2@5460,980 ; v1(5430,2020) C185.2@5460,2020 ; C189.2@5650,1240 v1(5650,1270) ; v1(5650,1630) C25.2@5650,1660 ; v1(5650,1790) C187.2@5650,1820 ; C13.2@5650,4480 v1(5650,4510) ; C175.2@5650,4640 v1(5650,4670) ; v1(5650,4790) C12.2@5650,4820 ; v1(5650,5030) C173.2@5650,5060 ; C257.2@6090,2860 v1(6125,2860) ; C256.2@6090,3160 v1(6125,3160) ; C254.2@6090,3500 v1(6125,3500) ; v1(6360,3645) C253.2@6360,3680 ; C259.2@6450,2540 v1(6450,2575) ; v1(6580,3645) C252.2@6580,3680 ; C258.2@6790,2540 v1(6790,2575) ; C255.2@7040,3250 v1(7040,3285) ; C265.2@7650,1410 v1(7710,1410) ; C263.2@7780,1420 v1(7815,1420) ; C264.2@7780,1570 v1(7815,1570)
  BottomLayer (1 oz) w20: J18.2@160,455 v1(300,455) ; J18.2@160,845 v1(300,845) ; J17.2@160,1175 v1(300,1175) ; J17.2@160,1565 v1(300,1565) ; J19.2@160,1895 v1(300,1895) ; J19.2@160,2285 v1(300,2285) ; J16.2@160,2615 v1(300,2615) ; J16.2@160,3005 v1(300,3005) ; J7.2@160,3335 v1(300,3335) ; J7.2@160,3725 v1(300,3725) ; J6.2@160,4055 v1(300,4055) ; J6.2@160,4445 v1(300,4445) ; J12.2@1355,160 v1(1355,300) ; J12.2@1745,160 v1(1745,300) ; v1(1755,5700) J11.2@1755,5840 ; J15.2@2105,160 v1(2105,300) ; v1(2145,5700) J11.2@2145,5840 ; v1(2475,5700) J9.2@2475,5840 ; J15.2@2495,160 v1(2495,300) ; J14.2@2855,160 v1(2855,300) ; v1(2865,5700) J9.2@2865,5840 ; v1(3195,5700) J10.2@3195,5840 ; J14.2@3245,160 v1(3245,300) ; v1(3585,5700) J10.2@3585,5840 ; J13.2@3605,160 v1(3605,300) ; v1(3915,5700) J8.2@3915,5840 ; J13.2@3995,160 v1(3995,300) ; v1(4305,5700) J8.2@4305,5840
  BottomLayer (1 oz) w24: v1(1735,3150) 1935,3150 ; v1(2085,2500) 2085,2700 ; v1(2385,2500) 2385,2700 ; 2385,3300 v1(2385,3500) ; 2535,2850 v1(2735,2850)
  other v1: 2690,140 5375,140 5880,140 4825,155 1905,160 750,175 1100,175 3395,175 4220,190 850,400 850,450 950,450 1365,490 475,500 850,500 1950,525 2125,525 2525,525 850,550 950,550 900,600 4975,620 900,650 850,700 950,700 6310,745 900,750 5715,750 900,800 2210,830 2410,830 2525,850 3770,850 3920,850 3970,850 4020,850 4070,850 2260,880 2310,880 2360,880 2460,880 3135,885 3670,900 3720,900 2185,930 3770,950 3920,950 4020,950 5150,980 5190,980 7315,980 4445,990 6955,990 245,1020 545,1035 1325,1050 3815,1105 1875,1125 3620,1130 1100,1175 2580,1380 2915,1415 7475,1535 205,1735 2589.13,1889.13 2636.38,1889.13 2683.62,1889.13 2730.87,1889.13 860,1890 2589.13,1936.38 2636.38,1936.38 2683.62,1936.38 2730.87,1936.38 810,1940 1775,1975 2589.13,1983.62 2636.38,1983.62 2683.62,1983.62 2730.87,1983.62 810,1990 5150,2020 5190,2020 2589.13,2030.87 2636.38,2030.87 2683.62,2030.87 2730.87,2030.87 910,2040 5545,2040 2738.74,2075 910,2090 4635,2155 7685,2180 5985,2185 2035,2205 750,2225 6695,2275 3849.13,2299.13 3896.38,2299.13 3943.62,2299.13 3990.87,2299.13 1125,2300 5670,2300 1510,2310 5450,2330 3849.13,2346.38 3896.38,2346.38 3943.62,2346.38 3990.87,2346.38 4430,2350 3849.13,2393.62 3896.38,2393.62 3943.62,2393.62 3990.87,2393.62 450,2400 3849.13,2440.87 3896.38,2440.87 3943.62,2440.87 3990.87,2440.87 205,2450 3998.74,2485 2800,2495 4530,2500 4430,2510 4335,2515 1785,2600 2135,2600 1240,2605 4235,2615 7915,2635 7060,2680 7160,2680 7260,2680 2775,2700 4230,2710 4330,2710 4740,2710 3370,2720 3135,2725 3280,2730 3430,2740 3550,2740 3750,2740 3850,2740 5750,2775 5270,2780 1725,2785 2500,2790 4130,2790 4630,2810 4730,2810 6960,2815 3840,2825 3760,2840 3460,2870 2355,2875 7160,2875 7260,2875 2075,2885 1970,2900 2500,2900 1835,2905 3160,2905 3760,2905 4530,2910 4630,2910 4730,2910 7585,2930 2780,2955 3840,2955 3220,2970 3760,2970 3460,2990 1685,3000 2085,3000 2185,3000 2285,3000 2385,3000 2485,3000 4630,3010 4730,3010 3160,3020 3760,3035 5670,3045 4330,3060 4130,3070 6960,3070 7060,3070 7160,3070 7260,3070 1835,3100 4230,3110 4630,3110 4730,3110 2420,3120 3430,3120 3550,3120 3750,3120 3850,3120 2115,3125 2265,3125 1965,3130 3370,3140 205,3185 425,3200 4840,3205 2500,3210 4220,3210 4530,3210 4730,3210 6590,3240 850,3260 1935,3305 850,3310 950,3310 4630,3310 4330,3320 5215,3325 850,3360 2335,3400 850,3410 950,3410 900,3460 2925,3490 900,3510 1400,3540 4440,3555 850,3560 950,3560 6010,3565 3849.13,3599.13 3896.38,3599.13 3943.62,3599.13 3990.87,3599.13 900,3610 3849.13,3646.38 3896.38,3646.38 3943.62,3646.38 3990.87,3646.38 900,3660 3849.13,3693.62 3896.38,3693.62 3943.62,3693.62 3990.87,3693.62 3849.13,3740.87 3896.38,3740.87 3943.62,3740.87 3990.87,3740.87 4330,3745 4640,3760 3998.74,3785 1395,3815 6480,3875 6990,3890 205,3910 7605,3910 400,3925 1980,3930 4355,3950 5625,3965 1175,3975 1315,4090 4615,4145 2559.13,4169.13 2606.38,4169.13 2653.62,4169.13 2700.87,4169.13 5070,4200 5110,4200 2559.13,4216.38 2606.38,4216.38 2653.62,4216.38 2700.87,4216.38 4370,4240 2559.13,4263.62 2606.38,4263.62 2653.62,4263.62 2700.87,4263.62 1175,4275 5750,4280 2559.13,4310.87 2606.38,4310.87 2653.62,4310.87 2700.87,4310.87 2708.74,4355 7575,4420 7030,4460 1110,4615 2225,4620 2840,4630 600,4825 900,4830 3575,4845 7455,4845 2010,4850 7045,4855 2545,4935 1730,5050 1830,5050 1980,5050 3330,5090 3380,5090 1880,5100 1930,5100 2030,5100 2080,5100 3180,5140 1680,5150 1730,5150 1780,5150 1830,5150 1980,5150 3230,5190 3280,5190 5070,5240 5110,5240 5800,5260 7460,5305 7065,5325 4310,5340 6300,5355 5535,5365 5225,5390 500,5500 1500,5500 4500,5530 5365,5845 5855,5850 7065,5885 6360,5900
HRESET#: JP26.1 U1.D2 U14.17 | length 10645.7
  TopLayer (1 oz) w5: v1(1885,2550) U1.D2@1910,2575 ; v1(5362.5,3262.5) U14.17@5425.04,3262.5
  MidLayer1 (0.5 oz) w5: JP26.1@4560,3850 4560,3690 4987.5,3262.5 v1(5362.5,3262.5)
  BottomLayer (1 oz) w5: v1(1885,2550) 1910,2525 1910,2240 1365,1695 1365,1565 750,950 750,860 825,785 825,640 1010,455 1095,455 1265,625 4095,625 4280,810 4725,810 4855,940 4855,1075 4900,1120 4945,1120 5031.57,1206.57 5031.57,1322.83 5070.94,1362.2 5070.94,1834.65 5060,1845.59 5060,2610 5155,2705 5295,2705 5345,2755 5345,2950 5385,2990 5385,3135 5362.5,3157.5 v1(5362.5,3262.5)
I2SCL: R17.1 U7.29 U8.6 U14.20 | length 1894.5
  TopLayer (1 oz) w5: U14.20@5425.04,3337.5 v1(5507.5,3337.5) ; v1(6815.47,3455.47) U7.29@6866.97,3455.47 ; U7.29@6866.97,3450 U8.6@7080,3450 ; U8.6@7110,3450 7160,3500 R17.1@7160,3620
  MidLayer1 (0.5 oz) w5: v1(5507.5,3337.5) 5575,3405 6765,3405 v1(6815.47,3455.47)
I2SDA: R18.1 U7.30 U8.5 U14.21 | length 1791.1
  TopLayer (1 oz) w5: U14.21@5425.04,3362.5 v1(5487.5,3362.5) ; v1(6820,3500) U7.30@6840,3480 ; U7.30@6866.97,3481.06 7031.06,3481.06 U8.5@7050,3500 ; U8.5@7080,3500 R18.1@7080,3620
  MidLayer1 (0.5 oz) w5: v1(5487.5,3362.5) 5580,3455 6775,3455 v1(6820,3500)
IFCLK: U2.T4 U3.B5 U7.26 | length 4818.8
  TopLayer (1 oz) w5: U2.T4@5385.9,4503.47 v1(5405.59,4483.78) ; U3.B5@5425.27,1677.16 v1(5444.96,1696.85) ; v1(6791.3,3378.7) U7.26@6866.97,3378.7
  BottomLayer (1 oz) w5: v1(5405.59,4483.78) 5501.22,4483.78 5525,4460 5525,4300 5595,4230 5675,4230 6115,3790 6665,3790 6791.3,3663.7 6791.3,2828.7 6855,2765 6855,2725 6390,2260 5925,2260 5525,1860 5525,1745 5496.54,1716.54 5464.65,1716.54 v1(5444.96,1696.85)
INA1+: R63.1 U1.B11 U20.13 | length 987.4
  TopLayer (1 oz) w12.34: U20.13@1010,3510 v1(1070,3510) ; R63.1@1560,3140 cw(c1560,3019.29) 1645.36,3104.64 1664.9,3085.1 ccw(c1749.64,3169.85) 1749.64,3050 cw(c1749.64,2964.64) U1.B11@1810,3025
  MidLayer1 (0.5 oz) w5.07: v1(1070,3510) 1100,3510 cw(c1100,3389.29) 1185.36,3474.64 1204.64,3455.36 cw(c1119.29,3370) 1240,3370 ccw(c1324.5,3370) 1264.75,3310.25 1399.64,3175.36 ccw(c1485,3260.71) 1485,3140 v1(1530,3140)
INA1-: R63.2 U1.A11 U20.12 | length 983.7
  TopLayer (1 oz) w12.34: U20.12@1010,3460 v1(1070,3460) ; R63.2@1554.64,3070 cw(c1554.64,2984.64) 1615,3045 ccw(c1663.28,3093.28) 1663.28,3025 U1.A11@1760,3025
  MidLayer1 (0.5 oz) w5.07: v1(1070,3460) cw(c1070,3339.29) 1155.36,3424.64 cw(c1071.72,3341.01) 1190,3341.01 1190,3260 ccw(c1310.71,3260) 1225.36,3174.64 1294.64,3105.36 ccw(c1380,3190.71) 1380,3070 v1(1530,3070)
INA2+: C68.1 R61.2 U1.B14 | length 2764
  TopLayer (1 oz) w12.34: C68.1@490,5240 v1(530,5240) ; R61.2@1550,3290 v1(1585,3290) ; v1(1785,3200) U1.B14@1810,3175
  MidLayer1 (0.5 oz) w5.07: v1(530,5240) cw(c530,5131.36) 606.82,5208.18 1324.64,4490.36 cw(c1239.29,4405) 1360,4405 1360,3520 ccw(c1480.71,3520) 1395.36,3434.64 1518.79,3311.21 ccw(c1570,3362.43) 1570,3290 v1(1585,3290) 1645,3290 cw(c1645,3253.79) 1670.61,3279.39 1717.93,3232.07 ccw(c1735,3249.14) 1735,3225 cw(c1735,3164.64) 1777.68,3207.32 v1(1785,3200)
INA2-: C71.1 R61.1 U1.A14 | length 2760.2
  TopLayer (1 oz) w12.34: C71.1@490,5160 v1(530,5160) ; R61.1@1550,3220 v1(1585,3220) ; v1(1735,3200) U1.A14@1760,3175
  MidLayer1 (0.5 oz) w5.07: v1(530,5160) cw(c530,5051.36) 606.82,5128.18 cw(c526.72,5048.08) 640,5048.08 ccw(c756.07,5048.08) 673.99,4966.01 1107.47,4532.53 ccw(c1186.01,4611.07) 1186.01,4500 cw(c1186.01,4381.72) 1269.63,4465.37 cw(c1184.29,4380) 1305,4380 cw(c1184.29,4380) 1269.64,4294.64 ccw(c1353.28,4211.01) 1235,4211.01 1235,3653.99 ccw(c1353.28,3653.99) 1269.64,3570.36 cw(c1184.29,3485) 1305,3485 ccw(c1425.71,3485) 1340.36,3399.64 1484.64,3255.36 ccw(c1570,3340.71) 1570,3220 v1(1585,3220) 1686.72,3220 cw(c1686.72,3151.72) v1(1735,3200)
INB1+: R68.1 U1.B17 U21.13 | length 1960.9
  TopLayer (1 oz) w12.34: v1(1785,3350) U1.B17@1810,3325 ; v1(1930,4930) U21.13@1930,4990
  MidLayer1 (0.5 oz) w5.07: v1(1785,3350) 1774.14,3360.86 ccw(c1740,3326.72) 1740,3375 1734.5,3375 cw(c1734.5,3494.5) v1(1650,3410) 1620.36,3439.64 cw(c1705.71,3525) 1586.59,3505.48 cw(c1705.71,3525) 1585,3525 1585,4420 cw(c1705.71,4420) 1620.36,4505.36 ; v1(1930,4930) 1930,4785 cw(c1809.29,4785) 1894.64,4699.64 1756.92,4561.92 cw(c1691.92,4626.92) 1691.92,4535 ccw(c1691.92,4433.79) 1620.45,4505.45 ; 1620.37,4505.37 cw(c1703.99,4421.72) 1620.45,4505.45 ; 1620.37,4505.37 cw(c1691.92,4433.79) 1620.45,4505.45
INB1-: R68.2 U1.A17 U21.12 | length 1957.6
  TopLayer (1 oz) w12.34: v1(1723.79,3340) cw(c1723.79,3288.79) U1.A17@1760,3325 ; v1(1880,4930) U21.12@1880,4990
  MidLayer1 (0.5 oz) w5.07: v1(1723.79,3340) v1(1650,3340) cw(c1650,3412.43) 1598.79,3361.21 1565.36,3394.64 cw(c1650.71,3480) 1530,3480 1530,4460 cw(c1650.71,4460) 1565.36,4545.36 1844.64,4824.64 ccw(c1759.29,4910) 1880,4910 v1(1880,4930)
INB2+: C77.2 R65.1 R138.1 R142.2 U1.B19 | length 433.8
  TopLayer (1 oz) w12.34: R65.1@1785,3610 1785,3465 ccw(c1821.21,3465) 1795.61,3439.39 U1.B19@1810,3425 ; R65.1@1790,3610 R142.2@1790,3690 C77.2@1790,3770 R138.1@1870,3770 ; U1.B19@1810,3425 ccw(c1870.36,3485.36) U1.B19@1810,3425 U1.B19@1810,3425
INB2-: C79.2 R65.2 R139.2 R143.1 U1.A19 | length 438.4
  TopLayer (1 oz) w12.34: R139.2@1630,3770 C79.2@1710,3770 R143.1@1710,3690 R65.2@1710,3610 ; R65.2@1715,3610 1715,3520 ccw(c1835.71,3520) 1750.36,3434.64 U1.A19@1760,3425
INC1+: R70.1 U1.B1 U22.13 | length 3417.4
  TopLayer (1 oz) w12.34: R70.1@1810,2390 U1.B1@1810,2525 ; v1(1820,2355) R70.1@1820,2390 ; v1(3820,950) U22.13@3820,1010
  MidLayer1 (0.5 oz) w5.07: v1(1820,2355) 1820,1790 ccw(c1940.71,1790) 1855.36,1704.64 1859.64,1700.36 ccw(c1945,1785.71) 1882.65,1682.35 ccw(c1945,1785.71) 1945,1665 2075,1665 cw(c2075,1544.29) 2160.36,1629.64 cw(c2076.72,1546.01) 2195,1546.01 2195,1450 ccw(c2315.71,1450) 2230.36,1364.64 ccw(c2313.99,1448.28) 2313.99,1330 2630,1330 cw(c2630,1209.29) 2715.36,1294.64 2739.64,1270.36 cw(c2654.29,1185) 2775,1185 2775,1160 ccw(c2895.71,1160) 2810.36,1074.64 ccw(c2869.85,1134.14) 2869.85,1050 3070,1050 cw(c3070,929.29) 3155.36,1014.64 3255.29,914.71 ccw(c3339.08,998.49) 3339.08,880 ccw(c3339.08,990.86) 3417.47,912.47 cw(c3496.01,833.93) 3496.01,945 cw(c3496.01,826.72) 3579.63,910.37 ccw(c3665,995.71) 3665,875 3768.79,875 ccw(c3768.79,926.21) 3805,890 ccw(c3768.79,926.21) 3820,926.21 v1(3820,950)
INC1-: R70.2 U1.A1 U22.12 | length 3415.8
  TopLayer (1 oz) w12.34: v1(1750,2355) R70.2@1750,2390 ; R70.2@1760,2390 U1.A1@1760,2525 ; v1(3870,950) U22.12@3870,1010
  MidLayer1 (0.5 oz) w5.07: v1(1750,2355) 1750,1770 ccw(c1870.71,1770) 1785.36,1684.64 2164.64,1305.36 ccw(c2250,1390.71) 2250,1270 2405,1270 cw(c2405,1149.29) 2490.36,1234.64 2729.64,995.36 ccw(c2815,1080.71) 2815,960 2875,960 cw(c2875,839.29) 2960.36,924.64 3034.64,850.36 ccw(c3120,935.71) 3120,815 3754.68,815 ccw(c3754.68,935.71) 3840.04,850.36 ccw(c3767.7,922.7) 3870,922.7 v1(3870,950)
INC2+: C102.1 R72.1 R153.2 R158.2 U1.B3 | length 695.2
  TopLayer (1 oz) w12.34: R153.2@1520,2230 C102.1@1600,2230 R158.2@1600,2310 R72.1@1600,2390 1600,2600 cw(c1650,2600) 1650,2650 1749.64,2650 cw(c1749.64,2564.64) U1.B3@1810,2625
INC2-: C104.1 R72.2 R154.1 R159.2 U1.A3 | length 698.2
  TopLayer (1 oz) w12.34: R72.2@1670,2390 R72.2@1670,2395 ; R154.1@1760,2230 C104.1@1680,2230 R159.2@1680,2310 1680,2370.86 ccw(c1645.86,2370.86) R72.2@1670,2395 ; U1.A3@1760,2625 1677,2625 ccw(c1677,2606) 1658,2606 1658,2573 ccw(c1683,2573) 1683,2548 cw(c1683,2534) 1697,2534 1697,2523 cw(c1686,2523) 1686,2512 1647,2512 ccw(c1647,2498) 1633,2498 1633,2487 ccw(c1649,2487) 1649,2471 1670,2471 cw(c1670,2457) 1684,2457 1684,2444 cw(c1677,2444) 1677,2437 ccw(c1677,2430) 1670,2430 R72.2@1670,2395
IND1+: R74.1 U1.B6 U23.13 | length 2695.5
  TopLayer (1 oz) w12.34: U23.13@1010,650 v1(1070,650) ; v1(1785,2800) U1.B6@1810,2775
  MidLayer1 (0.5 oz) w5.07: v1(1070,650) ccw(c1070,746.57) 1138.28,678.28 1149.64,689.64 ccw(c1064.29,775) 1185,775 1185,2410 cw(c1305.71,2410) 1220.36,2495.36 1439.64,2714.64 cw(c1525,2629.29) 1525,2750 v1(1570,2750) 1585.15,2750 ccw(c1585.15,2834.14) 1644.64,2774.64 cw(c1730,2689.29) 1730,2810 1760.86,2810 cw(c1760.86,2775.86) v1(1785,2800)
IND1-: R74.2 U1.A6 U23.12 | length 2702.5
  TopLayer (1 oz) w12.34: U23.12@1010,600 v1(1070,600) ; v1(1735,2750) U1.A6@1760,2775
  MidLayer1 (0.5 oz) w5.07: v1(1070,600) 1085,600 ccw(c1085,720.71) 1170.36,635.36 1204.64,669.64 ccw(c1119.29,755) 1240,755 1240,1805.59 cw(c1347.22,1805.59) 1271.4,1881.4 ccw(c1202.37,1950.44) 1300,1950.44 ccw(c1192.43,1950.44) 1268.49,2026.51 cw(c1337.28,2095.29) 1240.72,2083.48 cw(c1337.28,2095.29) 1240,2095.29 cw(c1335.86,2095.29) 1268.08,2163.08 ccw(c1191.01,2240.15) 1300,2240.15 ccw(c1203.79,2240.15) 1293.47,2275 ccw(c1203.79,2240.15) 1271.82,2308.18 cw(c1348.64,2385) 1240,2385 cw(c1360.71,2385) 1275.36,2470.36 1449.64,2644.64 cw(c1535,2559.29) 1535,2680 v1(1570,2680) 1615,2680 ccw(c1615,2800.71) 1700.36,2715.36 v1(1735,2750)
IND2+: C119.2 R75.2 R141.2 R145.1 U1.B9 | length 519.5
  TopLayer (1 oz) w12.34: R141.2@1390,3080 C119.2@1390,3000 R145.1@1470,3000 ; R145.1@1470,2990 R75.2@1550,2990 cw(c1550,2905.5) 1609.75,2965.25 ccw(c1646.57,3002.07) 1646.57,2950 1770,2950 cw(c1770,2913.79) 1795.61,2939.39 U1.B9@1810,2925
IND2-: C116.2 R75.1 R140.1 R144.2 U1.A9 | length 521.3
  TopLayer (1 oz) w12.34: R140.1@1390,2840 C116.2@1390,2920 R144.2@1470,2920 R75.1@1550,2920 1610,2920 cw(c1610,2900) 1629.04,2906.12 cw(c1610,2900) 1630,2900 ccw(c1670,2900) 1670,2860 ccw(c1670,2900) 1710,2900 cw(c1735,2900) 1735,2925 U1.A9@1760,2925
INSELA: pad.TVIA@3845,4350 U1.D4 U2.D13 | length 4282.2
  TopLayer (1 oz) w12: U1.D4@1910,2675 v1(1935,2700) ; v1(4893.78,4877.48) U2.D13@4913.47,4857.8
  MidLayer3 (0.5 oz) w5: v1(1935,2700) 1935,2900 2260,3225 2260,3275 2310,3325 2310,3620 2760.57,4070.57 2785.57,4070.57 2821.1,4106.1 2821.1,4116.1 3055,4350 3570,4350 3590,4330 3610,4330 3630,4350 3695,4350 3715,4330 3735,4330 3755,4350 4125,4350 4632.8,4857.8 4874.1,4857.8 v1(4893.78,4877.48)
INSELB: pad.TVIA@3725,4300 U1.C4 U2.E3 | length 4161.1
  TopLayer (1 oz) w12: v1(1835,2650) U1.C4@1860,2675 ; v1(4933.15,4444.41) U2.E3@4952.84,4464.1
  MidLayer4 (0.5 oz) w5: v1(1835,2650) 1860,2675 1960,2675 2035,2750 2035,2800 2460,3225 2460,3525 2495,3560 2680,3560 3420,4300 3570,4300 3590,4280 3610,4280 3630,4300 3815,4300 3835,4280 3855,4280 3875,4300 4820,4300 4913.47,4393.47 4913.47,4424.73 v1(4933.15,4444.41)
INSELC: pad.TVIA@3720,1400 U1.C3 U3.P15 | length 4348.8
  TopLayer (1 oz) w12: v1(1835,2600) U1.C3@1860,2625 ; v1(4933.15,1263.78) U3.P15@4952.84,1283.47
  MidLayer1 (0.5 oz) w5: v1(1835,2600) 1860,2575 1860,2475 1885,2450 1885,2145 1900,2130 1900,1755 1925,1730 3010,1730 3340,1400 3930,1400 3950,1380 4225,1380 4505,1100 4840,1100 4913.47,1173.47 4913.47,1244.09 v1(4933.15,1263.78)
INSELD: pad.TVIA@3780,1470 U1.D3 U3.T16 | length 3720.2
  TopLayer (1 oz) w12: v1(1885,2600) U1.D3@1910,2625 ; v1(4854.41,1224.41) U3.T16@4874.1,1244.1
  MidLayer2 (0.5 oz) w5: v1(1885,2600) 1910,2575 1910,2485 1945,2450 1990,2450 2115,2325 2335,2325 2615,2045 2615,2015 2625,2005 2650,2005 2660,1995 2660,1970 2670,1960 2765,1960 2905,1820 2985,1820 3335,1470 3630,1470 3650,1490 3670,1490 3690,1470 4225,1470 4490.28,1204.72 4834.72,1204.72 v1(4854.41,1224.41)
L270A_04: R170.1 U2.M16 | length 1056.6
  TopLayer (1 oz) w5: U2.M16@5228.43,4975.9 v1(5248.11,4995.59) ; v1(5865,5605) R170.1@5865,5640
  BottomLayer (1 oz) w5: v1(5248.11,4995.59) 5267.8,5015.28 5267.8,5087.8 5320,5140 5320,5280 5495,5455 5715,5455 v1(5865,5605)
L270B_04: R176.1 U2.P16 | length 1924.3
  TopLayer (1 oz) w5: U2.P16@5307.16,4975.9 v1(5326.85,4995.59) ; v1(6900,5605) R176.1@6900,5640
  BottomLayer (1 oz) w5: v1(5326.85,4995.59) 5365,5033.74 5365,5095 5375,5105 5505,5105 5885,5485 6780,5485 v1(6900,5605)
L270C_05: R182.1 U3.G16 | length 1086.8
  TopLayer (1 oz) w5: R182.1@4845,350 v1(4845,385) ; U3.G16@5228.43,1244.1 v1(5248.11,1224.41)
  BottomLayer (1 oz) w5: v1(4845,385) 5015,555 5045,555 5228.43,738.43 5228.43,1204.72 v1(5248.11,1224.41)
L270D_05: R188.1 U3.E17 | length 1098.2
  TopLayer (1 oz) w5: U3.E17@5307.16,1204.73 v1(5326.85,1185.04) ; R188.1@5895,350 v1(5895,385)
  BottomLayer (1 oz) w5: v1(5326.85,1185.04) 5346.54,1165.35 5346.54,1123.46 5390,1080 5390,890 v1(5895,385)
L360A_04: R171.1 U2.L17 | length 911.7
  TopLayer (1 oz) w5: U2.L17@5189.06,5015.27 5208.74,5034.96 5208.74,5138.74 5220,5150 5220,5280 5445,5505 5570,5505 R171.1@5705,5640
L360B_04: R177.1 U2.P17 | length 1739.6
  TopLayer (1 oz) w5: U2.P17@5307.16,5015.27 v1(5326.85,5034.96) ; v1(6740,5605) R177.1@6740,5640
  BottomLayer (1 oz) w5: v1(5326.85,5034.96) 5346.54,5054.65 5346.54,5101.54 5360,5115 5500,5115 5890,5505 6640,5505 v1(6740,5605)
L360C_05: R183.1 U3.H17 | length 1259.1
  TopLayer (1 oz) w5: R183.1@4685,350 4880,545 5050,545 5305,800 5305,1060 5208.74,1156.26 5208.74,1185.04 U3.H17@5189.06,1204.73
L360D_05: R189.1 U3.F17 | length 1112.7
  TopLayer (1 oz) w5: U3.F17@5267.8,1204.73 5287.48,1185.04 5287.48,1152.52 5335,1105 5445,1105 5485,1065 5485,600 R189.1@5735,350
L540A_04: R172.1 U2.L18 | length 732.8
  TopLayer (1 oz) w5: U2.L18@5189.06,5054.65 5189.06,5139.06 5210,5160 5210,5305 R172.1@5545,5640
L540B_04: R178.1 U2.N18 | length 1615.1
  TopLayer (1 oz) w5: U2.N18@5267.8,5054.65 5267.8,5067.8 5325,5125 5495,5125 5535,5165 5535,5255 5725,5445 6385,5445 R178.1@6580,5640
L540C_05: R184.1 U3.H18 | length 1368.6
  TopLayer (1 oz) w5: R184.1@4525,350 4740,565 5055,565 5295,805 5295,1055 5240,1110 5230,1110 5189.06,1150.94 U3.H18@5189.06,1165.35
L540D_05: R190.1 U3.F18 | length 1004.1
  TopLayer (1 oz) w5: U3.F18@5267.8,1165.35 5267.8,1152.2 5325,1095 5430,1095 5460,1065 5460,465 R190.1@5575,350
L7425A_04: R173.1 U2.L16 | length 745.3
  TopLayer (1 oz) w5: U2.L16@5189.06,4975.9 v1(5208.74,4995.59) ; v1(5385,5605) R173.1@5385,5640
  BottomLayer (1 oz) w5: v1(5208.74,4995.59) 5228.43,5015.28 5228.43,5083.43 5300,5155 5300,5520 v1(5385,5605)
L7425B_04: R179.1 U2.N16 | length 1489.9
  TopLayer (1 oz) w5: U2.N16@5267.8,4975.9 v1(5287.48,4995.59) ; v1(6420,5605) R179.1@6420,5640
  BottomLayer (1 oz) w5: v1(5287.48,4995.59) 5307.17,5015.28 5307.17,5087.17 5345,5125 5425,5125 5825,5525 6340,5525 v1(6420,5605)
L7425C_05: R185.1 U3.H16 | length 1371.8
  TopLayer (1 oz) w5: R185.1@4365,350 v1(4365,385) ; U3.H16@5189.06,1244.1 v1(5208.74,1224.41)
  BottomLayer (1 oz) w5: v1(4365,385) 4625,645 4830,645 5070,885 5070,1010 5208.74,1148.74 v1(5208.74,1224.41)
L7425D_05: R191.1 U3.F16 | length 955.1
  TopLayer (1 oz) w5: U3.F16@5267.8,1244.1 v1(5287.48,1224.41) ; R191.1@5415,350 v1(5415,385)
  BottomLayer (1 oz) w5: v1(5287.48,1224.41) 5307.17,1204.72 5307.17,1132.83 5375,1065 5375,425 v1(5415,385)
L\F\I\A\: pad.TVIA@3845,4050 U1.W17 U2.F4 | length 3010.5
  TopLayer (1 oz) w12: U1.W17@2660,3325 v1(2685,3350) ; v1(4972.52,4483.78) U2.F4@4992.2,4503.47
  MidLayer3 (0.5 oz) w5: v1(2685,3350) 2710,3375 2770,3375 2935,3540 2935,3695 3290,4050 3570,4050 3590,4030 3610,4030 3630,4050 4620,4050 4690,4120 4715,4120 4860,4265 4860,4290 4890,4320 4925,4320 4952.84,4347.84 4952.84,4464.1 v1(4972.52,4483.78)
L\F\I\B\: pad.TVIA@3725,4450 U1.K20 U2.C7 | length 3360.7
  TopLayer (1 oz) w12: v1(2185,3500) U1.K20@2210,3475 ; v1(4854.41,4601.89) U2.C7@4874.1,4621.57
  MidLayer4 (0.5 oz) w5: v1(2185,3500) 2185,3525 2145,3565 2145,3610 2170,3635 2265,3635 2345,3715 2595,3715 2770,3890 2770,3915 2790,3935 2815,3935 3119.42,4239.42 3119.42,4244.42 3141.41,4266.41 3146.41,4266.41 3320,4440 3630,4440 3640,4450 3815,4450 3835,4430 3855,4430 3875,4450 3930,4450 3950,4470 3975,4470 3995,4450 4545,4450 4677.2,4582.2 4834.73,4582.2 v1(4854.41,4601.89)
L\F\I\C\: pad.TVIA@3720,1550 U1.L3 U3.R11 | length 3487.7
  TopLayer (1 oz) w12: U1.L3@2260,2625 v1(2285,2600) ; v1(4893.78,1421.26) U3.R11@4913.47,1440.94
  MidLayer1 (0.5 oz) w5: v1(2285,2600) 2260,2575 2260,2250 2425,2085 2425,2030 2450,2005 2800,2005 2890,1915 3055,1915 3420,1550 3810,1550 3830,1530 3850,1530 3870,1550 4050,1550 4070,1530 4090,1530 4110,1550 4400,1550 4555,1395 4725,1395 4731.57,1401.57 4874.1,1401.57 v1(4893.78,1421.26)